# Altium PCB 四旋翼飞控.PcbDoc
Units mm, origin at the board's own origin, x right, y up, seen from the top; angles counter-clockwise.
Board outline 55 x 55 mm, 2 copper layers (Top Layer, Bottom Layer); 46 components, 40 nets, 189 pads, 28 vias.
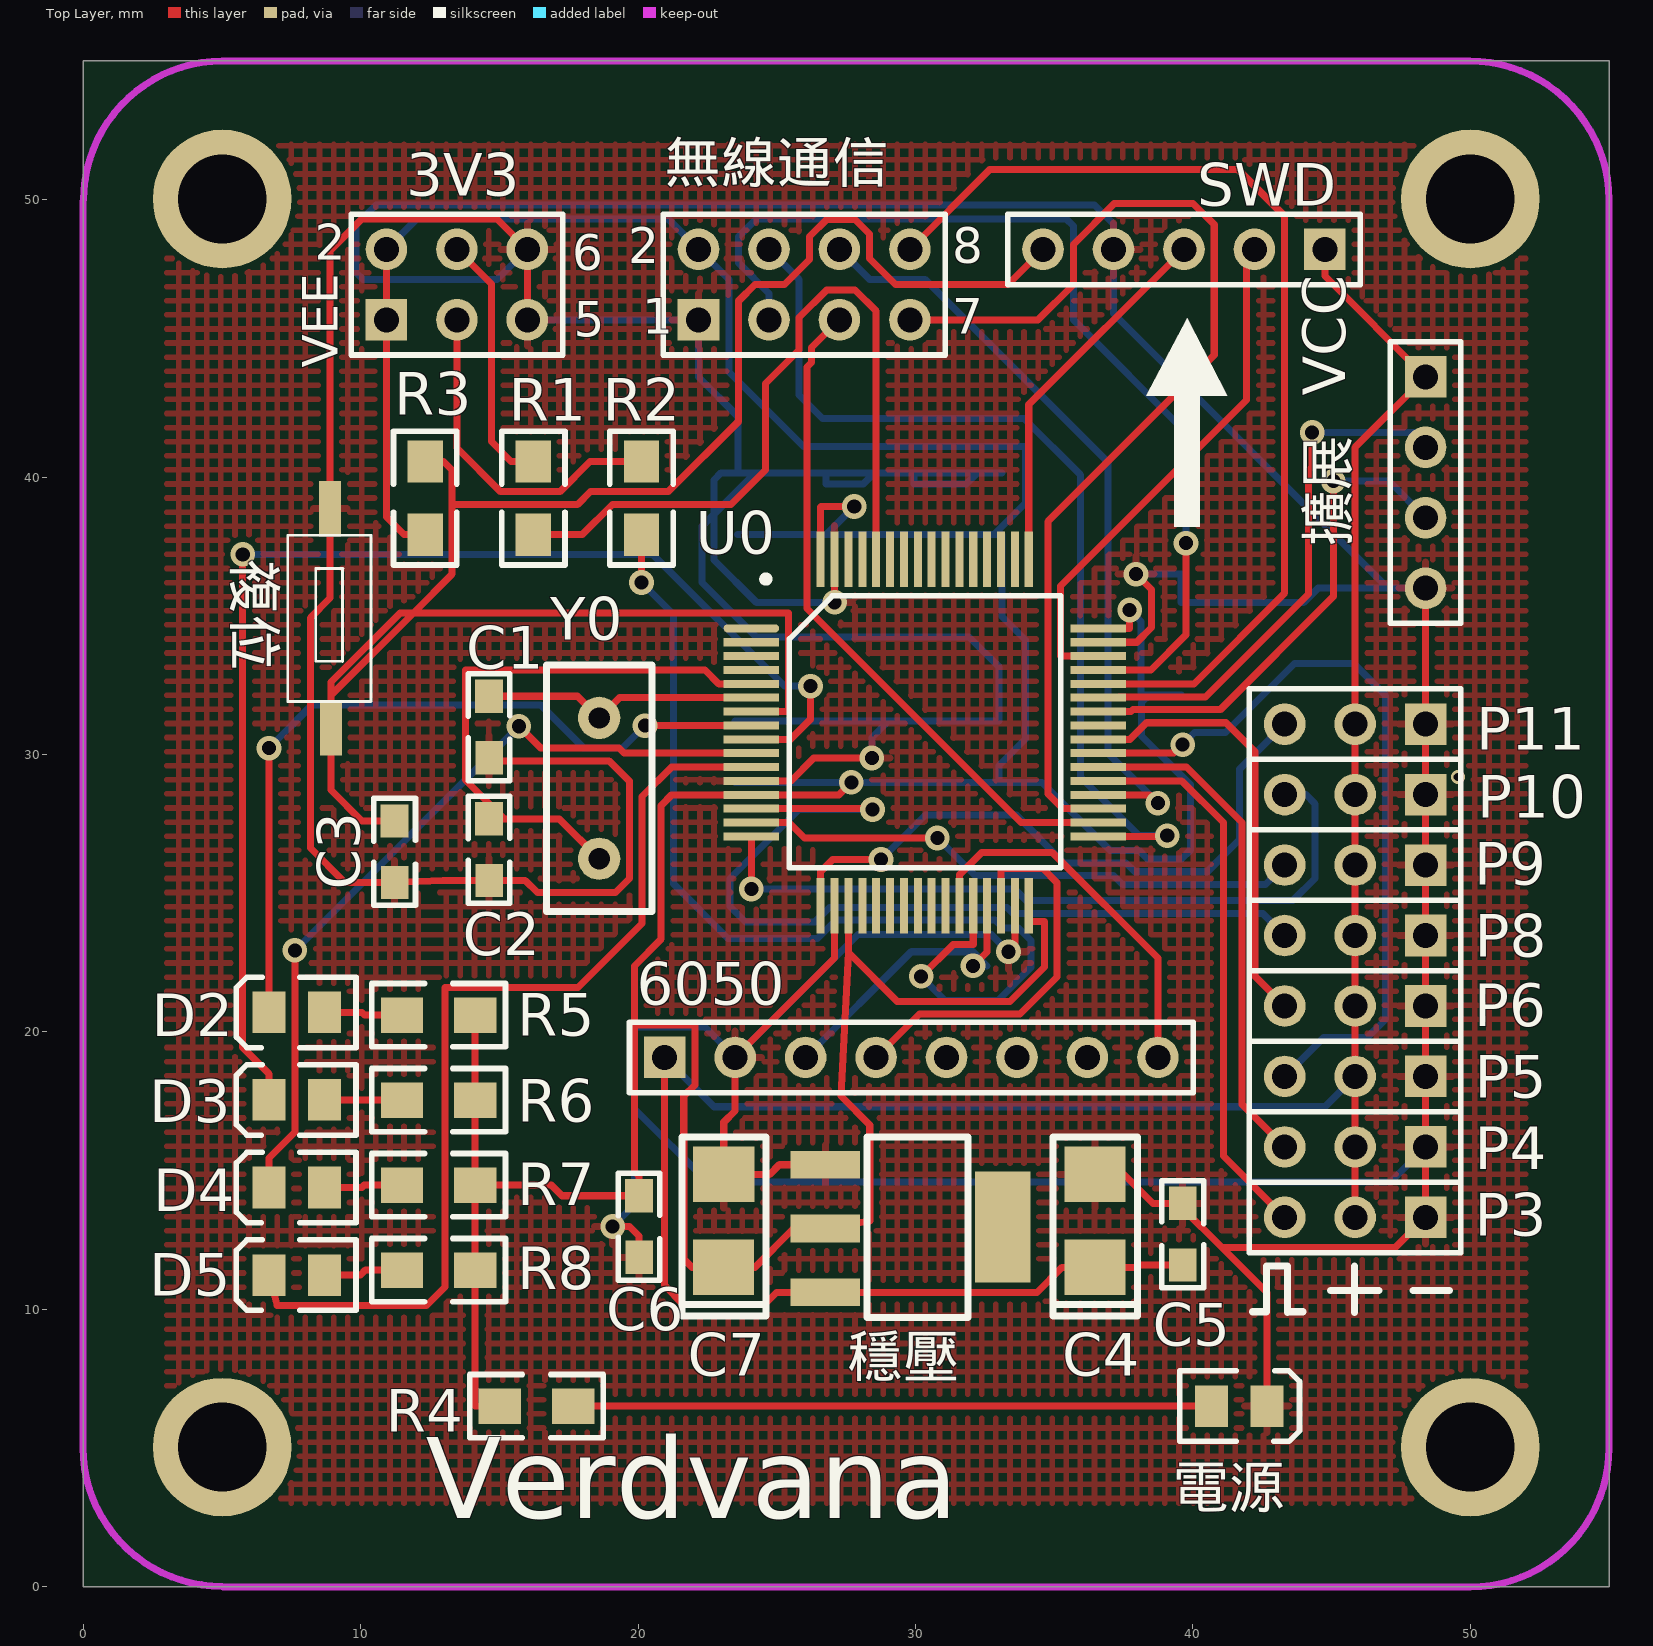
[diagram p0: Top Layer view]
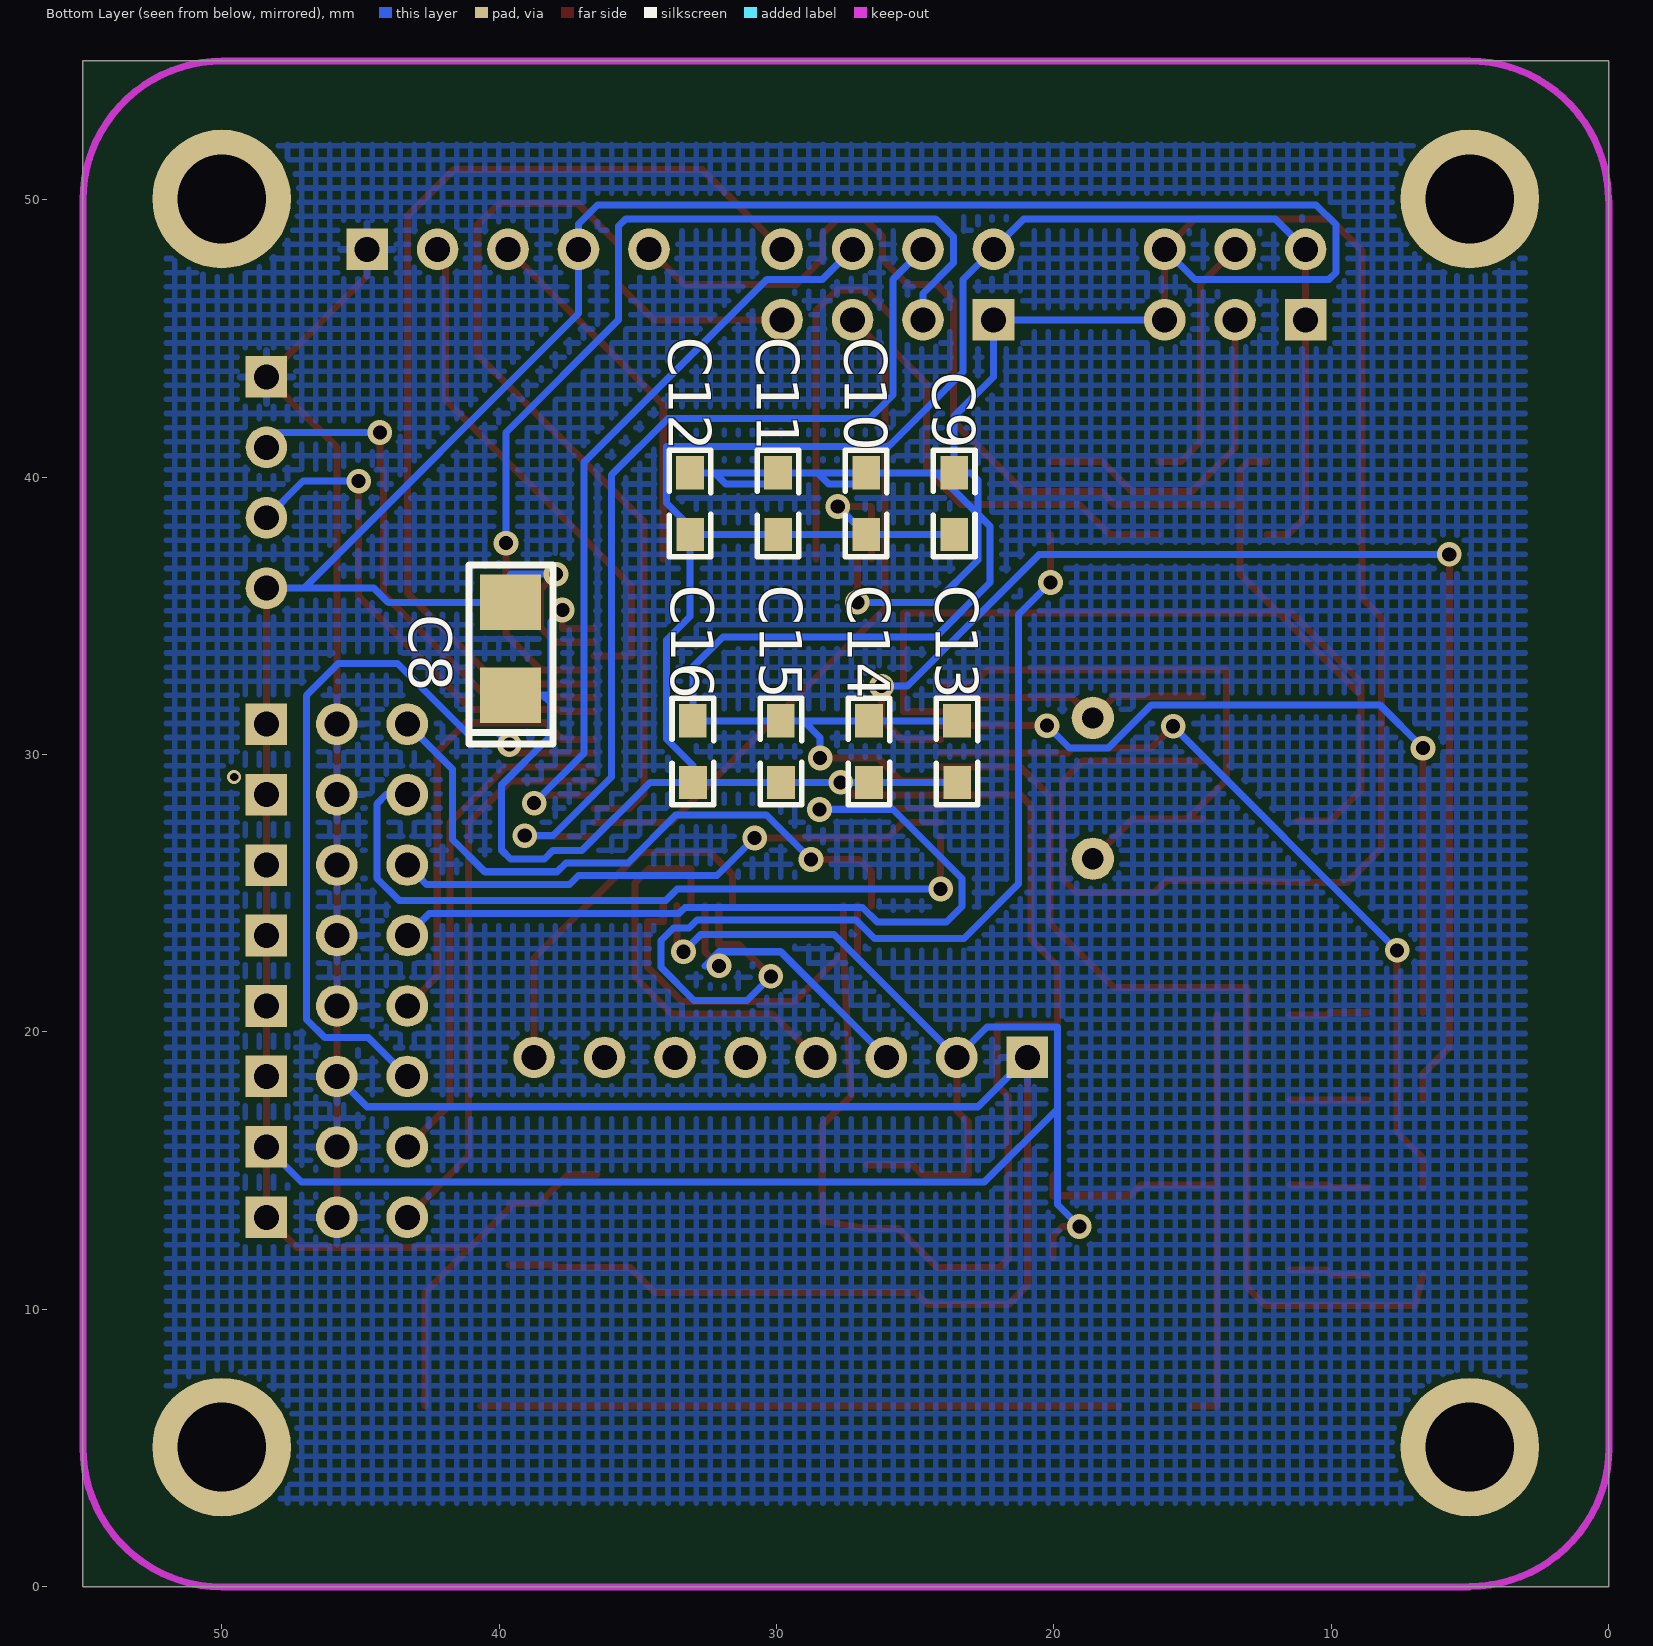
[diagram p1: Bottom Layer view, seen from below]

## Layer stack, top to bottom
Top Solder: solder mask 0.0102, Solder Resist, Dk 3.5
Top Layer: signal copper 0.0356
Dielectric1: dielectric 0.32, FR-4, Dk 4.8
Bottom Layer: signal copper 0.0356
Bottom Solder: solder mask 0.0102, Solder Resist, Dk 3.5

## Board outline
0,0 0,55 55,55 55,0 0,0

## Design rules (kind name [scope] priority, off if disabled: settings)
Clearance [All] p1: gap=0.203 ignorepadtopadclearanceinfootprint=FALSE except(0: Arc-Hole Track-Hole SMDPad-Hole THPad-Hole Via-Hole Fill-Hole Poly-Hole Region-Hole Text-Hole)
PolygonConnect [All] p1: connectstyle=Relief reliefconductorwidth=0.254 reliefentries=4 polygonreliefangle="90 Angle" airgapwidth=0.254
RoomDefinition 四旋翼飞控 [InComponentClass('四旋翼飞控')] p1: confinementstyle=ConfineIn formatcopy=TRUE outline 0,0.025 54.991,0.025 54.991,55.016 0,55.016
RoutingVias [All] p1: holewidth=0.508 width=0.889 viastyle="Through Hole" minholewidth=0.254 minwidth=0.508 maxholewidth=1.27 maxwidth=1.778
SilkToSolderMaskClearance SilkscreenOverComponentPads [IsPad] p1: minsilkscreentomaskgap=0.254 clearancetoexposedcopper=TRUE
SolderMaskExpansion [All] p1: expansion=0.102
Width [All] p1: maxlimit=0.5 minlimit=0.254 preferedwidth=0.254 minimp=50.000000 maximp=50.000000 favimp=50.000000
29 further rules are at their usual default settings.

## Components (designator, comment, footprint, x,y, rotation, side; value= is the part's Value field where it differs from the comment)
3V3 "p" HDR2X3 10.922,45.669 r0 top (schematic designator P2)
6050 "MPU6050" HDR1X8 20.955,19.075 r0 top (schematic designator P0)
C1 "20pF" C0603 14.63,29.794 r90 top
C2 "20pF" C0603 14.63,25.375 r90 top
C3 "100nF" C0603 11.227,25.298 r90 top
C4 "10uF" C_B3528 37.998,10.058 r90 top
C5 "100nF" C0603 39.624,13.894 r270 top
C6 "100nF" C0603 20.041,11.786 r90 top
C7 "10uF" C_B3528 24.613,10.058 r90 top
C8 "10uF" C_B3528 38.049,30.683 r90 bottom
C9 "100nF" C0603 23.597,40.234 r270 bottom
C10 "100nF" C0603 26.772,40.234 r270 bottom
C11 "100nF" C0603 29.947,40.234 r270 bottom
C12 "100nF" C0603 33.122,40.234 r270 bottom
C13 "100nF" C0603 23.495,31.293 r270 bottom
C14 "100nF" C0603 26.67,31.293 r270 bottom
C15 "100nF" C0603 29.845,31.293 r270 bottom
C16 "100nF" C0603 33.02,31.293 r270 bottom
D2 "LED" LED 8.687,20.701 r180 top
D3 "LED" LED 8.687,17.543 r180 top
D4 "LED" LED 8.687,14.385 r180 top
D5 "LED" LED 8.687,11.227 r180 top
P3 "Header 3" HDR1X3 48.387,13.31 r180 top
P4 "Header 3" HDR1X3 48.387,15.85 r180 top
P5 "Header 3" HDR1X3 48.387,18.39 r180 top
P6 "Header 3" HDR1X3 48.387,20.93 r180 top
P8 "Header 3" HDR1X3 48.387,23.47 r180 top
P9 "Header 3" HDR1X3 48.387,26.01 r180 top
P10 "Header 3" HDR1X3 48.387,28.55 r180 top
P11 "Header 3" HDR1X3 48.387,31.09 r180 top
R1 "10K" R0805 16.218,40.386 r270 top
R2 "10K" R0805 20.117,38.1 r90 top
R3 "10K" R0805 12.319,38.1 r90 top
R4 "510" R0805 15.189,6.502 r0 top
R5 "510" R0805 13.945,20.599 r180 top
R6 "510" R0805 13.945,17.534 r180 top
R7 "510" R0805 13.945,14.47 r180 top
R8 "510" R0805 13.945,11.405 r180 top
SWD "SWD" HDR1X5 44.755,48.209 r180 top (schematic designator P1)
U0 "STM32F1_64pin" LQFP64 24.079,34.544 r0 top
Y0 "8M" Y 18.593,31.318 r90 top
擴展 "Header 4" HDR1X4 48.387,43.612 r270 top
無線通信 "無線通信" HDR2X4 22.174,45.669 r0 top (schematic designator P12)
穩壓 "X1117" X1117 28.245,16.205 r270 top
複位 "SK" KEY 10.363,31.902 r90 top
電源 "LED" LED 40.665,6.502 r0 top

## Footprints (in the part's own frame and the unit in brackets; to place one, negate y for a bottom-side part, rotate by r counter-clockwise, add the part's x,y. Pads: shape width x height; smd on the part's side, far side on the other; paste and mask are expansions set on the pad)
C0603 [mm]
  rect 1.2x1 smd: 1(0.081,0.006) 2(2.302,0.011)
  silkscreen extent -0.74,-0.74 3.12,0.76, body extent 0.38,-0.51 2.01,0.51, height 1
C_B3528 [mm]
  rect 2x2.2 smd: 1(1.45,1.53) 2(4.8,1.529)
  silkscreen extent -0.3,0 6.15,3.04, body extent 1.02,0.25 5.08,2.79, height 1.51
HDR1X3 [mm]
  rect 1.5x1.5 hole 0.9: 1(0,0)
  round 1.5 hole 0.9: 2(2.54,0) 3(5.08,0)
  silkscreen extent -1.27,-1.27 6.35,1.27
HDR1X4 [mm]
  rect 1.5x1.5 hole 0.9: 1(0,0)
  round 1.5 hole 0.9: 2(2.54,0) 3(5.08,0) 4(7.62,0)
  silkscreen extent -1.27,-1.27 8.89,1.27
HDR1X5 [mm]
  rect 1.5x1.5 hole 0.9: 1(0,0)
  round 1.5 hole 0.9: 2(2.54,0) 3(5.08,0) 4(7.62,0) 5(10.16,0)
  silkscreen extent -1.27,-1.27 11.43,1.27
HDR1X8 [mm]
  rect 1.5x1.5 hole 0.9: 1(0,0)
  round 1.5 hole 0.9: 2(2.54,0) 3(5.08,0) 4(7.62,0) 5(10.16,0) 6(12.7,0) 7(15.24,0) 8(17.78,0)
  silkscreen extent -1.27,-1.27 19.05,1.27
HDR2X3 [mm]
  rect 1.5x1.5 hole 0.9: 1(0,0)
  round 1.5 hole 0.9: 2(0,2.54) 3(2.54,0) 4(2.54,2.54) 5(5.08,0) 6(5.08,2.54)
  silkscreen extent -1.27,-1.27 6.35,3.81
HDR2X4 [mm] "Connector; Header;"
  rect 1.5x1.5 hole 0.9: 1(0,0)
  round 1.5 hole 0.9: 2(0,2.54) 3(2.54,0) 4(2.54,2.54) 5(5.08,0) 6(5.08,2.54) 7(7.62,0) 8(7.62,2.54)
  silkscreen extent -1.27,-1.27 8.89,3.81
KEY [mm]
  rect 2x0.8 smd: 1(6.96,1.473) 2(-0.944,1.444)
  silkscreen extent 0,0 6,3, body extent -1.14,0.13 7.11,2.92, height 2
LED [mm]
  rect 1.2x1.5 smd: 1(0,0) 2(2,0)
  silkscreen extent -1.14,-1.27 3.17,1.27
LQFP64 [mm]
  oval 2x0.29 smd: 1(0,0)
  rect 2x0.29 smd: 2(0,-0.5) 3(0,-1) 4(0,-1.5) 5(0,-2) 6(0,-2.5) 7(0,-3) 8(0,-3.5) 9(0,-4) 10(0,-4.5) 11(0,-5) 12(0,-5.5) 13(0,-6) 14(0,-6.5) 15(0,-7) 16(0,-7.5) 33(12.5,-7.5) 34(12.5,-7) 35(12.5,-6.5) 36(12.5,-6) 37(12.5,-5.5) 38(12.5,-5) 39(12.5,-4.5) 40(12.5,-4) 41(12.5,-3.5) 42(12.5,-3) 43(12.5,-2.5) 44(12.5,-2) 45(12.5,-1.5) 46(12.5,-1) 47(12.5,-0.5) 48(12.5,0)
  rect 0.29x2 smd: 17(2.5,-10) 18(3,-10) 19(3.5,-10) 20(4,-10) 21(4.5,-10) 22(5,-10) 23(5.5,-10) 24(6,-10) 25(6.5,-10) 26(7,-10) 27(7.5,-10) 28(8,-10) 29(8.5,-10) 30(9,-10) 31(9.5,-10) 32(10,-10) 49(10,2.5) 50(9.5,2.5) 51(9,2.5) 52(8.5,2.5) 53(8,2.5) 54(7.5,2.5) 55(7,2.5) 56(6.5,2.5) 57(6,2.5) 58(5.5,2.5) 59(5,2.5) 60(4.5,2.5) 61(4,2.5) 62(3.5,2.5) 63(3,2.5) 64(2.5,2.5)
  silkscreen extent 0.41,-8.64 11.15,1.89
R0805 [mil]
  rect 60x50 smd: 1(-7,0) 2(97,0)
  silkscreen extent -50,-45 140,45, body extent -2,-30 97,30, height 20
X1117 [mm]
  rect 1x2.5 smd: 1(1,-1.5) 2(3.3,-1.5) 3(5.6,-1.5)
  rect 4x2 smd: NC(3.25,4.9)
  silkscreen extent 0,0 6.5,3.65
Y [mil]
  round 60 hole 30: 0(-200,0) 1(0,0)
  silkscreen extent -275,-75 75,75

## Part data
3V3: library part "Header 3X2", "Header, 3-"
6050: library part "Header 8", "H"
C1 C2 C3 C5 C6 C9 C10 C11 C12 C13 C14 C15 C16: library part Cap
C4 C7 C8: library part Cap2
D2 D3 D4 D5: "Typical"
P3 P4 P5 P6 P8 P9 P10 P11: "H"
R1 R2 R3 R4 R5 R6 R7 R8: library part Res, "P"
SWD: library part "Header 5", "H"
U0: library part S
無線通信: library part "Header 4X2", "Header, 4-Pin, Dual row"
電源: "T"

## Free pads (board coordinates)
  round 5 hole 3.2: 0(5,5.025) 1(5,50.025) 2(50,50.025) 3(50,5.025)

## Via types
v1: diameter 0.889, hole 0.508, Top Layer to Bottom Layer, 27 vias
v2: diameter 0.508, hole 0.305, Top Layer to Bottom Layer, 1 vias

## Nets (pads, with @x,y where several pads share a name; then routed paths per layer and width w, separated by ;. In a path a pad name is that pad's centre, name@x,y a point inside that pad or via, vN(x,y) a via of type N, cw(c..) or ccw(c..) an arc to the next point about the centre after c; other vN are vias at no path point)
BOOT0: R1.2 U0.60 | length 27.8
  Top Layer w0.254: R1.2 17.983,37.922 19.075,39.014 23.343,39.014 24.587,40.259 24.587,43.37 25.794,44.577 25.794,45.746 26.797,46.749 27.813,46.749 28.579,45.983 U0.60
BOOT1: R2.1 U0.28 | length 36.9
  Top Layer w0.254: v1(20.117,36.195) R2.1 ; v1(30.201,21.996) 31.356,23.152 32.079,23.152 U0.28
  Bottom Layer w0.254: v1(20.117,36.195) 21.272,35.039 21.272,25.337 23.241,23.368 26.467,23.368 27.127,24.029 32.864,24.029 33.148,23.745 33.71,23.745 34.163,23.292 34.163,22.327 32.969,21.133 31.064,21.133 v1(30.201,21.996)
CE: U0.45 無線通信.3 | length 36
  Top Layer w0.254: U0.45 38.481,33.044 39.751,34.314 v1(39.751,37.617)
  Bottom Layer w0.254: 無線通信.3 24.714,46.621 23.622,47.713 23.622,48.666 24.257,49.301 35.433,49.301 35.687,49.047 35.687,45.669 39.751,41.605 v1(39.751,37.617)
CSN: U0.33 無線通信.4 | length 34.4
  Top Layer w0.254: U0.33 39.046,27.044 v1(39.072,27.07)
  Bottom Layer w0.254: 無線通信.4 25.794,47.129 25.794,42.964 26.645,42.113 33.909,42.113 35.942,40.081 35.942,29.184 38.056,27.07 v1(39.072,27.07)
GND: 3V3.5 3V3.6 6050.2 C1.1 C2.1 C3.1 C4.2 C5.1 C6.1 C7.2 C8.2 C9.1 C10.1 C11.1 C12.1 C13.1 C14.1 C15.1 C16.1 P3.1 P4.1 P5.1 P6.1 P8.1 P9.1 P10.1 P11.1 SWD.4 U0.12 U0.18 U0.31 U0.47 U0.63 擴展.4 無線通信.1 穩壓.1 複位.1 電源.2 | length 310.3
  Top Layer w0.254: C1.1 14.624,29.769 18.948,29.769 19.685,29.032 19.685,25.527 19.177,25.019 16.363,25.019 15.926,25.456 C2.1 12.954,25.456 C3.1 9.418,25.38 8.179,26.619 8.179,34.925 8.89,35.636 複位.1 8.89,48.158 10.033,49.301 14.91,49.301 3V3.6 3V3.5 ; v1(19.075,12.979) 19.685,12.979 20.034,12.63 C6.1 ; U0.12 25.502,29.044 26.328,29.87 v1(28.423,29.87) ; 穩壓.1 25.086,15.205 24.74,14.858 C7.2 23.084,16.739 23.495,17.15 6050.2 27.079,22.66 U0.18 ; v1(27.079,35.484) U0.63 ; v1(33.35,22.885) 33.579,23.114 U0.31 ; C4.2 37.516,14.858 38.562,13.813 C5.1 39.63,13.633 41.046,12.217 ; U0.47 37.973,34.044 38.505,34.576 38.505,35.942 v1(37.948,36.499) ; 電源.2 42.665,10.598 41.046,12.217 ; 擴展.4 P11.1 P10.1 P9.1 P8.1 P6.1 P5.1 P4.1 P3.1 47.295,12.217 41.046,12.217
  Bottom Layer w0.254: 3V3.5 無線通信.1 22.174,43.605 23.59,42.189 C9.1 ; 3V3.6 14.91,47.117 10.084,47.117 9.83,47.371 9.83,49.098 10.541,49.809 36.449,49.809 37.135,49.124 SWD.4 37.135,45.892 47.035,35.992 ; v1(19.075,12.979) 19.863,13.767 19.863,17.221 ; C13.1 C14.1 29.027,31.212 ; v1(27.079,35.484) 24.257,35.484 22.733,37.008 22.733,38.657 ; v1(28.423,29.87) 28.423,30.607 29.027,31.212 ; C12.1 32.235,40.152 ; v1(33.35,22.885) 32.729,23.507 27.926,23.507 6050.2 22.403,20.168 19.863,20.168 19.863,17.221 ; v1(37.948,36.499) 39.578,36.499 C8.2 43.993,35.483 44.501,35.992 47.035,35.992 ; P4.1 47.117,14.58 22.504,14.58 19.863,17.221 ; 擴展.4 47.035,35.992 ; 22.733,38.657 24.228,40.152 ; 22.733,38.657 22.303,38.227 22.303,36.193 24.257,34.239 31.921,34.239 33.014,33.147 C16.1 C15.1 29.027,31.212 ; 22.733,38.657 22.733,39.898 22.987,40.152 C9.1 ; C9.1 24.228,40.152 ; 24.228,40.152 24.94,40.152 C10.1 ; C10.1 28.522,40.152 ; C10.1 26.765,39.745 28.115,39.745 28.522,40.152 ; 28.522,40.152 C11.1 ; C11.1 32.235,40.152 ; C11.1 29.94,39.745 31.828,39.745 32.235,40.152
INT: 6050.8 U0.27 | length 13.8
  Top Layer w0.254: U0.27 31.579,25.661 32.385,26.467 34.925,26.467 38.735,22.657 6050.8
IRQ: U0.44 無線通信.8 | length 37.1
  Top Layer w0.254: 無線通信.8 32.664,51.079 41.631,51.079 43.307,49.403 43.307,35.816 40.035,32.544 U0.44
LED0: D2.2 U0.8 | length 28.6
  Top Layer w0.254: D2.2 v1(6.687,30.226) ; v1(20.244,31.039) 20.249,31.044 U0.8
  Bottom Layer w0.254: v1(6.687,30.226) 8.249,31.788 16.472,31.788 18.034,30.226 19.431,30.226 v1(20.244,31.039)
LED1: D3.2 U0.9 | length 46.1
  Top Layer w0.254: v1(5.74,37.211) 5.74,19.431 6.687,18.485 D3.2 ; U0.9 25.489,30.544 26.213,31.267 v1(26.213,32.461)
  Bottom Layer w0.254: v1(5.74,37.211) 20.523,37.211 25.273,32.461 v1(26.213,32.461)
LED2: D4.2 U0.10 | length 29.1
  Top Layer w0.254: D4.2 6.687,15.45 7.62,16.383 v1(7.62,22.936) ; v1(15.697,31.013) 16.484,30.226 19.304,30.226 19.486,30.044 U0.10
  Bottom Layer w0.254: v1(7.62,22.936) v1(15.697,31.013)
LED3: D5.2 U0.11 | length 35.3
  Top Layer w0.254: D5.2 6.985,10.135 12.37,10.135 13.03,10.795 13.03,21.59 17.831,21.59 20.142,23.901 20.142,28.477 21.209,29.544 U0.11
MISO: U0.35 無線通信.7 | length 38.9
  Top Layer w0.254: 無線通信.7 34.417,45.669 35.687,46.939 35.687,48.387 37.16,49.86 40.005,49.86 40.767,49.098 40.767,44.399 34.773,38.405 34.773,28.575 35.304,28.044 U0.35
MOSI: U0.36 無線通信.6 | length 28.2
  Top Layer w0.254: U0.36 38.436,28.544 v1(38.735,28.245)
  Bottom Layer w0.254: 無線通信.6 28.334,47.129 30.341,47.129 36.944,40.526 36.944,30.035 v1(38.735,28.245)
MOTOR1: P3.3 U0.37 | length 20.3
  Top Layer w0.254: U0.37 39.594,29.044 41.097,27.541 41.097,15.519 P3.3
MOTOR2: P4.3 U0.38 | length 18.4
  Top Layer w0.254: U0.38 39.773,29.544 41.77,27.547 41.77,17.387 P4.3
MOTOR3: P5.3 U0.39 | length 28.3
  Top Layer w0.254: U0.39 39.319,30.044 v1(39.628,30.353)
  Bottom Layer w0.254: v1(39.628,30.353) 40.06,30.785 41.173,30.785 43.663,33.274 45.796,33.274 46.939,32.131 46.939,20.447 46.279,19.787 44.704,19.787 P5.3
MOTOR4: P6.3 U0.40 | length 15.9
  Top Layer w0.254: U0.40 37.732,30.544 38.329,31.14 41.186,31.14 42.227,30.099 42.227,22.01 P6.3
Net3V3_3: 3V3.3 R2.2 | length 12.4
  Top Layer w0.254: 3V3.3 13.462,41.046 15.037,39.472 17.174,39.472 18.266,40.564 R2.2
Net3V3_4: 3V3.4 R1.1 | length 9.3
  Top Layer w0.254: 3V3.4 14.707,46.965 14.707,41.275 15.418,40.564 R1.1
NetC1_2: C1.2 U0.6 Y0.1 | length 10.1
  Top Layer w0.254: C1.2 17.815,32.096 Y0.1 19.319,32.044 U0.6
NetC2_2: C2.2 U0.5 Y0.0 | length 21
  Top Layer w0.254: C2.2 15.173,27.677 ; Y0.0 17.154,27.677 15.173,27.677 ; U0.5 22.904,32.544 22.403,33.045 13.767,33.045 13.767,29.083 15.173,27.677
NetD2_1: D2.1 R5.2 | length 2.8
  Top Layer w0.254: D2.1 10.033,20.701 10.135,20.599 R5.2
NetD3_1: D3.1 R6.2 | length 2.8
  Top Layer w0.254: D3.1 10.058,17.543 10.067,17.534 R6.2
NetD4_1: D4.1 R7.2 | length 2.8
  Top Layer w0.254: D4.1 10.033,14.385 10.118,14.47 R7.2
NetD5_1: D5.1 R8.2 | length 2.9
  Top Layer w0.254: D5.1 9.982,11.227 10.16,11.405 R8.2
NetR4_2: R4.2 電源.1 | length 23
  Top Layer w0.254: R4.2 電源.1
NRST: C3.2 R3.2 SWD.5 U0.7 複位.2 | length 70.7
  Top Layer w0.254: C3.2 10.033,27.601 8.919,28.714 複位.2 8.919,32.131 ; R3.2 12.979,40.564 13.284,40.259 13.284,39.014 ; U0.7 25.425,31.544 25.425,35.103 11.891,35.103 ; SWD.5 33.325,46.939 29.274,46.939 28.334,47.879 28.334,48.768 27.813,49.289 26.797,49.289 26.174,48.666 26.174,47.84 25.273,46.939 24.206,46.939 23.622,46.355 23.622,42.012 21.082,39.472 18.275,39.472 17.818,39.014 13.284,39.014 ; 8.919,32.131 11.891,35.103 ; 8.919,32.131 8.919,32.604 11.418,35.103 11.891,35.103 ; 11.891,35.103 13.284,36.496 13.284,39.014
RF_1: P8.3 U0.14 | length 32.4
  Top Layer w0.254: U0.14 28.42,28.044 v1(28.448,28.016)
  Bottom Layer w0.254: v1(28.448,28.016) 25.794,28.016 23.305,25.527 23.305,24.511 23.863,23.952 26.365,23.952 26.899,24.486 33.299,24.486 33.528,24.257 42.52,24.257 P8.3
RF_2: P9.3 U0.15 | length 20.4
  Top Layer w0.254: U0.15 25.437,27.544 25.994,26.987 v1(30.784,26.987)
  Bottom Layer w0.254: v1(30.784,26.987) 32.142,25.629 37.135,25.629 37.453,25.312 42.609,25.312 P9.3
RF_3: P10.3 U0.16 | length 26.6
  Top Layer w0.254: v1(24.079,25.146) U0.16
  Bottom Layer w0.254: v1(24.079,25.146) 33.575,25.146 33.981,24.74 43.612,24.74 44.399,25.527 44.399,28.219 44.069,28.55 P10.3
RF_4: P11.3 U0.17 | length 23.3
  Top Layer w0.254: U0.17 26.579,25.781 27.011,26.213 v1(28.753,26.213)
  Bottom Layer w0.254: v1(28.753,26.213) 30.353,27.813 33.63,27.813 35.356,26.086 37.592,26.086 37.91,25.769 40.513,25.769 41.681,26.937 41.681,29.464 P11.3
SCK: U0.34 無線通信.5 | length 24.6
  Top Layer w0.254: 無線通信.5 26.251,44.666 26.251,44.132 26.086,43.967 26.086,35.255 33.797,27.544 U0.34
SCL: 6050.3 U0.29 | length 11.2
  Top Layer w0.254: v1(32.071,22.377) 32.576,22.882 32.576,23.66 32.579,23.66 U0.29
  Bottom Layer w0.254: 6050.3 29.845,22.885 32.068,22.885 32.576,22.377 v1(32.071,22.377)
SDA: 6050.4 U0.30 | length 14.7
  Top Layer w0.254: 6050.4 30.137,20.638 33.77,20.638 35.103,21.971 35.103,25.374 34.595,25.883 33.079,25.883 U0.30
SWCLK: SWD.3 U0.49 | length 13.5
  Top Layer w0.254: U0.49 34.079,42.614 SWD.3
SWDIO: SWD.2 U0.46 | length 19.1
  Top Layer w0.254: U0.46 35.23,33.544 35.23,36.068 41.935,42.774 41.935,48.209 SWD.2
USART1_RXD: U0.43 擴展.2 | length 19.6
  Top Layer w0.254: U0.43 37.313,32.044 37.338,32.069 40.451,32.069 44.171,35.789 44.171,40.234 44.298,40.361 v1(44.298,41.605)
  Bottom Layer w0.254: v1(44.298,41.605) 48.387,41.605 擴展.2
USART1_TXD: U0.42 擴展.3 | length 18.2
  Top Layer w0.254: U0.42 37.77,31.544 37.838,31.612 40.985,31.612 45.06,35.687 v1(45.06,39.853)
  Bottom Layer w0.254: v1(45.06,39.853) 47.066,39.853 擴展.3
VCC: 6050.1 C4.1 C5.2 P3.2 P4.2 P5.2 P6.2 P8.2 P9.2 P10.2 P11.2 SWD.1 擴展.1 穩壓.3 | length 91.3
  Top Layer w0.254: 6050.1 20.955,10.846 21.641,10.16 24.536,10.16 24.982,10.605 穩壓.3 34.377,10.605 35.281,11.508 C4.1 37.998,11.508 38.082,11.592 C5.2 ; SWD.1 44.755,47.244 擴展.1 45.847,41.072 P11.2 P10.2 P9.2 P8.2 P6.2 P5.2 P4.2 P3.2
  Bottom Layer w0.254: 6050.1 22.733,17.297 44.755,17.297 P5.2
VEE: 3V3.1 3V3.2 C6.2 C7.1 C8.1 C9.2 C10.2 C11.2 C12.2 C13.2 C14.2 C15.2 C16.2 R3.1 R4.1 R5.1 R6.1 R7.1 R8.1 U0.13 U0.19 U0.32 U0.48 U0.64 無線通信.2 穩壓.2 | length 182
  Top Layer w0.254: 3V3.2 3V3.1 10.922,38.557 11.557,37.922 R3.1 ; R5.1 R6.1 R7.1 ; R4.1 14.122,6.502 R8.1 R7.1 ; U0.64 26.579,38.924 26.594,38.938 v1(27.788,38.938) ; U0.19 27.579,22.853 ; v1(27.686,28.991) 27.239,28.544 U0.13 21.209,28.544 20.828,28.163 20.828,23.342 19.863,22.377 19.863,20.244 ; U0.32 34.079,23.978 34.646,23.978 34.646,22.34 33.401,21.095 29.337,21.095 27.579,22.853 ; U0.48 37.719,34.544 v1(37.719,35.204) ; R7.1 16.866,14.47 17.247,14.088 C6.2 20.029,14.794 19.863,14.961 19.863,20.244 ; 19.863,20.244 22.047,20.244 22.047,18.085 21.641,17.678 21.641,11.811 21.943,11.508 C7.1 24.206,11.508 25.603,12.905 穩壓.2 28.346,13.185 28.346,16.637 27.305,17.678 27.579,22.853
  Bottom Layer w0.254: 3V3.2 12.014,49.301 21.082,49.301 無線通信.2 23.266,47.117 23.266,43.79 25.959,41.097 33.96,41.097 33.96,39.065 C12.2@32.826,37.931 ; C13.2 C14.2 v1(27.686,28.991) C15.2 C16.2 ; C9.2 25.576,37.931 C10.2 C10.2@26.781,37.931 ; v1(27.788,38.938) C10.2@26.781,37.931 ; v1(37.719,35.204) 38.125,34.798 38.125,32.133 38.407,32.133 ; C8.1 38.407,32.133 ; C10.2@26.781,37.931 28.751,37.931 C11.2 31.978,37.931 C12.2@32.826,37.931 ; C12.2@32.826,37.931 C12.2 33.11,34.976 33.96,34.126 33.96,30.556 33.009,29.605 C16.2 ; C16.2 34.56,28.991 37.008,26.543 38.049,26.543 38.367,26.226 39.586,26.226 39.903,26.543 39.903,28.905 38.151,30.658 38.151,31.877 38.407,32.133
pads on no net: 6050.5 6050.6 6050.7 U0.1 U0.2 U0.3 U0.4 U0.20 U0.21 U0.22 U0.23 U0.24 U0.25 U0.26 U0.41 U0.50 U0.51 U0.52 U0.53 U0.54 U0.55 U0.56 U0.57 U0.58 U0.59 U0.61 U0.62 穩壓.NC
copper on no net:
  other v2: 49.554,29.185

## Polygon pours and split planes (outlines as drawn)
GND on Top Layer "Bottom Layer-No Net" (hatched 90Degree grid 0.508 track 0.203, remove dead copper, pour order 4): 3,3 52,3 52,52 3,52 3,3
VCC on Bottom Layer "Bottom Layer-No Net" (hatched 90Degree grid 0.508 track 0.203, pour order 6): 3,3 52,3 52,52 3,52 3,3

## Keep-outs
Keep-Out Layer:
  lines w0.254: -0.019,49.956 -0.019,5 ccw(c5,5.025) 5,0.007 ; 0.007,49.981 cw(c5.025,49.981) 5,55 49.975,55 ; 5.025,-0.019 50.007,-0.019 ccw(c49.981,5) 55,5 55,50 ccw(c49.981,49.975) 49.981,54.993

## Silkscreen, mask and mechanical layers (free items; w line width, h text height)
Top Overlay:
  rectangle: 39.319,38.202 40.259,44.806
  region: 38.316,42.926 41.237,42.926 39.802,45.72
  lines w0.254: 42.139,9.906 42.647,9.906 42.647,11.557 43.409,11.557 43.409,9.881 43.434,9.906 43.967,9.906 ; 44.958,10.668 46.711,10.668 ; 45.822,9.881 45.822,11.557 ; 47.93,10.668 49.251,10.668
  text "VCC" at 45.491,42.926 h1.52 r90
  text "Verdvana" at 12.344,1.499 h5

## Text inside footprints (layer, text, board x,y; h text height)
3V3: Top Overlay "6" at 17.628,47.447 h1.27; Top Overlay "5" at 17.678,45.06 h1.27; Top Overlay "2" at 8.331,47.828 h1.27; Top Overlay "VEE" at 9.169,43.942 h1.27 r90
無線通信: Top Overlay "2" at 19.634,47.701 h1.27; Top Overlay "1" at 20.142,45.161 h1.27; Top Overlay "7" at 31.318,45.161 h1.27; Top Overlay "8" at 31.318,47.701 h1.27